# Altium PCB Transmitter.PcbDoc
Units mm, origin at the board's own origin, x right, y up, seen from the top; angles counter-clockwise.
Board outline 152.4 x 101.6 mm, 2 copper layers (Top Layer, Bottom Layer); 10 components, 10 nets, 31 pads, 0 vias.
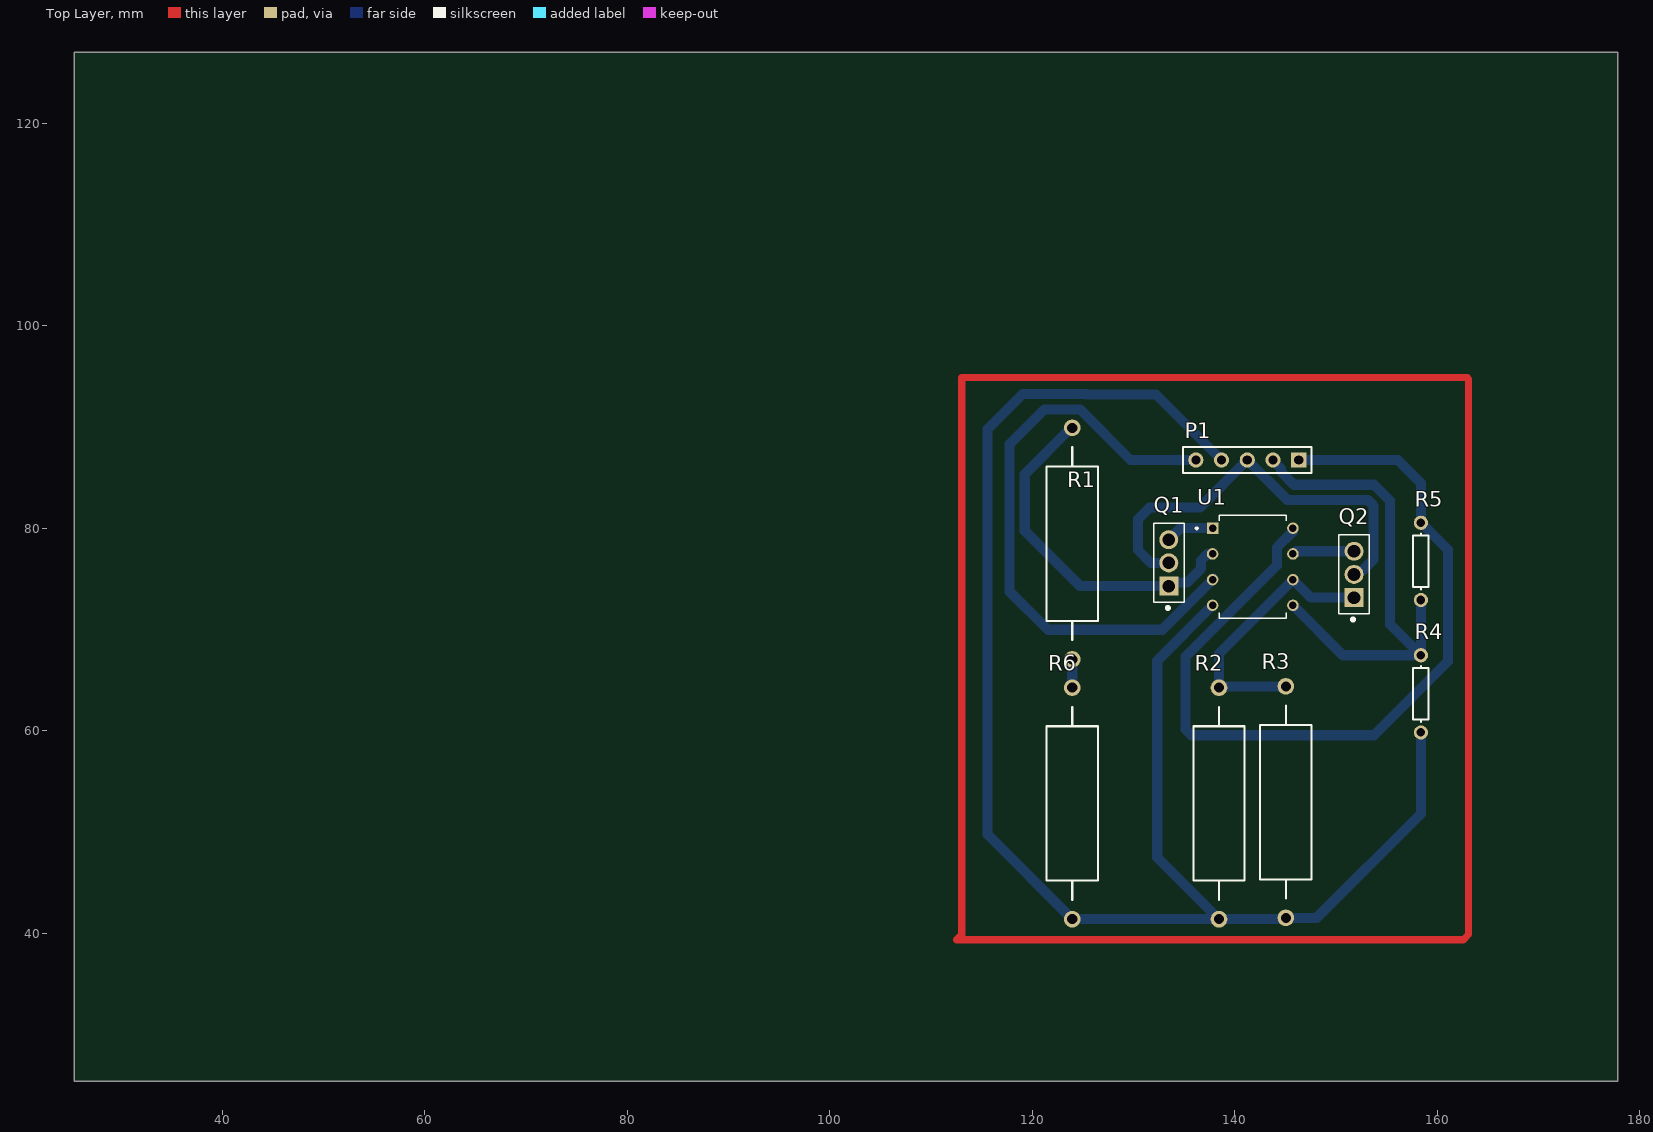
[diagram p0: Top Layer view]
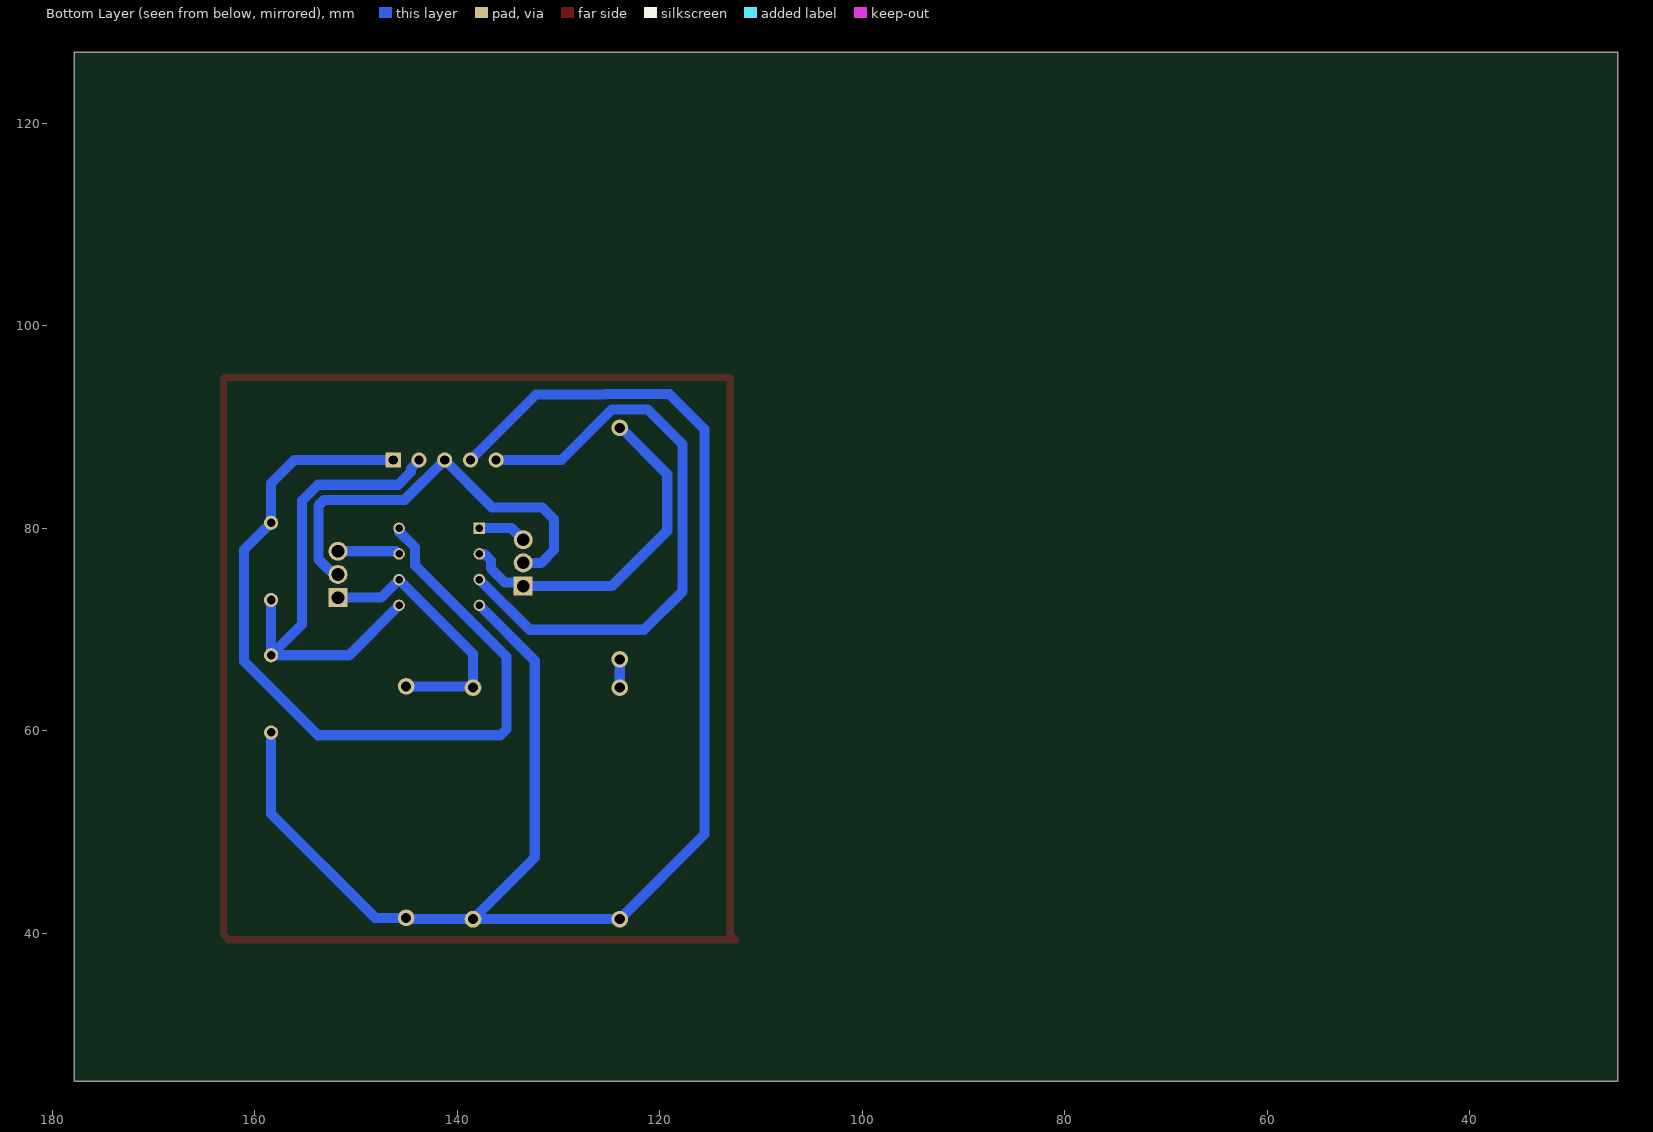
[diagram p1: Bottom Layer view, seen from below]

## Layer stack, top to bottom
Top Solder: solder mask 0.0102, Solder Resist, Dk 3.5
Top Layer: signal copper 0.0356
Dielectric 1: dielectric 0.32, FR-4, Dk 4.8
Bottom Layer: signal copper 0.0356
Bottom Solder: solder mask 0.0102, Solder Resist, Dk 3.5

## Board outline
25.4,25.4 177.8,25.4 177.8,127 25.4,127

## Design rules (kind name [scope] priority, off if disabled: settings)
Clearance [All] p1: gap=0.5 ignorepadtopadclearanceinfootprint=FALSE
PolygonConnect [All] p1: connectstyle=Relief reliefconductorwidth=0.254 reliefentries=4 polygonreliefangle="90 Angle" airgapwidth=0.254
RoutingLayers [All] p1: top layer_v5=FALSE bottom layer_v5=TRUE
RoutingVias [All] p1: holewidth=0.711 width=1.27 viastyle="Through Hole" minholewidth=0.711 minwidth=1.27 maxholewidth=0.711 maxwidth=1.27
SolderMaskExpansion [All] p1: expansion=0.102
Width [All] p1: maxlimit=1 minlimit=0.7 preferedwidth=0.8
29 further rules are at their usual default settings.

## Components (designator, comment, footprint, x,y, rotation, side; value= is the part's Value field where it differs from the comment)
P1 "Header 5" HDR1X5 146.304,86.741 r180 top
Q1 "BD135" *TO229P780X300X2000-3 133.477,74.291 r90 top
Q2 "BD135" *TO229P780X300X2000-3 151.765,73.152 r90 top
R1 "Res1" AXIAL-0.9 123.941,78.486 r90 top value=10
R2 "Res1" AXIAL-0.9 138.43,52.832 r90 top value=10
R3 "Res1" AXIAL-0.9 145.034,52.959 r90 top value=10
R4 "Res1" AXIAL-0.3 158.369,63.651 r90 top value=10k
R5 "Res1" AXIAL-0.3 158.369,76.732 r90 top value=20k
R6 "Res1" AXIAL-0.9 123.941,52.832 r90 top value=10
U1 "LM358N/NOPB" *DIP794W45P254L1016H508Q8 141.765,76.2 r0 top

## Footprints (in the part's own frame and the unit in brackets; to place one, negate y for a bottom-side part, rotate by r counter-clockwise, add the part's x,y. Pads: shape width x height; smd on the part's side, far side on the other; paste and mask are expansions set on the pad)
*DIP794W45P254L1016H508Q8 [mm]
  rect 1.14x1.14 hole 0.74: 1(-3.97,3.81)
  round 1.14 hole 0.74: 2(-3.97,1.27) 3(-3.97,-1.27) 4(-3.97,-3.81) 5(3.97,-3.81) 6(3.97,-1.27) 7(3.97,1.27) 8(3.97,3.81)
  silkscreen extent -5.63,-5.08 3.3,5.08
*TO229P780X300X2000-3 [mm]
  rect 1.875x1.875 hole 1.25: 1(0,0)
  round 1.875 hole 1.25: 2(2.29,0) 3(4.58,0)
  silkscreen extent -2.31,-1.5 6.19,1.5
AXIAL-0.3 [mm] "Axial Device, Thru-Hole; 2 Leads; 0.3 in Pin Spacing"
  round 1.4 hole 0.85: 1(-3.81,0) 2(3.81,0)
  silkscreen extent -2.77,-0.76 2.77,0.76
AXIAL-0.9 [mm] "Axial Device, Thru-Hole; 2 Leads; 0.9 in Pin Spacing"
  round 1.65 hole 1: 1(-11.43,0) 2(11.43,0)
  silkscreen extent -9.53,-2.54 9.53,2.54
HDR1X5 [mm] "Connector; Header; 5 Position"
  rect 1.5x1.5 hole 0.9: 1(0,0)
  round 1.5 hole 0.9: 2(2.54,0) 3(5.08,0) 4(7.62,0) 5(10.16,0)
  silkscreen extent -1.27,-1.27 11.43,1.27

## Part data
P1: "Header, 5-Pin", LatestRevisionDate=17-Jul-2002, LatestRevisionNote="Re-released for DXP Platform.", Publisher="Altium Limited"
Q1 Q2: "Trans GP BJT NPN 45V 1.5A 3-Pin TO-126", Package="TO-126-3 NXP Semiconductors", Availability=Unavailable, MF="ON Semiconductor", MP=BD135, Price=None, SnapEDA_Link=https://www.snapeda.com/parts/BD135/ON%20Semiconductor/view-part/?ref=snap
R1 R2 R3 R4 R5 R6: "Resistor", LatestRevisionDate=17-Jul-2002, LatestRevisionNote="Re-released for DXP Platform.", PackageDescription="Axial Device, Thru-Hole; 2 Leads; 0.3 in Pin Spacing", PackageReference=AXIAL-0.3, Published=8-Jun-2000, Publisher="Altium Limited"
U1: Package="DIP-8 Intersil", Availability=Unavailable, MF="ON Semiconductor", MP=LM358N, Price=None, SnapEDA_Link=https://www.snapeda.com/parts/LM358N/ON%20Semiconductor/view-part/?ref=snap

## Nets (pads, with @x,y where several pads share a name; then routed paths per layer and width w, separated by ;. In a path a pad name is that pad's centre, name@x,y a point inside that pad or via, vN(x,y) a via of type N, cw(c..) or ccw(c..) an arc to the next point about the centre after c; other vN are vias at no path point)
GND: P1.4 R2.1 R3.1 R4.1 R6.1 U1.4 | length 161.6
  Bottom Layer w1: U1.4 132.334,66.929 132.334,47.498 R2.1 ; P1.4 132.207,93.218 125.341,93.218 125.318,93.241 119.022,93.241 115.57,89.789 115.57,49.773 R6.1 R2.1 ; R4.1 158.369,51.816 148.082,41.529 R3.1 144.858,41.529 144.731,41.402 R2.1
INPUT: P1.5 U1.3 | length 60.2
  Bottom Layer w1: P1.5 129.697,86.741 124.697,91.741 121.205,91.741 117.729,88.265 117.729,73.787 121.539,69.977 132.842,69.977 U1.3 137.795,74.968 U1.3@137.865,75.038
LEDout: P1.3 Q1.2 Q2.2 | length 42.3
  Bottom Layer w0.8: Q2.2@151.474,75.442 Q2.2
  Bottom Layer w1: Q1.2 131.699,76.581 130.429,77.851 130.429,80.899 131.572,82.042 136.525,82.042 P1.3 145.161,82.804 153.117,82.804 153.703,82.218 153.703,76.929 152.568,75.794 152.354,75.794 152.002,75.442 Q2.2
NetQ1_1: Q1.1 R1.2 U1.2 | length 34.8
  Bottom Layer w1: R1.2 123.825,89.916 119.253,85.344 119.253,79.756 124.718,74.291 Q1.1 133.829,74.643 135.288,74.643 136.656,76.011 136.656,76.814 137.285,77.443 137.768,77.443 U1.2
NetQ1_3: Q1.3 U1.1 | length 4.8
  Bottom Layer w1: Q1.3 134.616,80.01 U1.1
NetQ2_1: Q2.1 R2.2 R3.2 U1.6 | length 27.3
  Bottom Layer w1: R3.2@144.91,64.513 R3.2 138.733,64.389 138.606,64.262 R2.2 138.43,67.625 U1.6 147.513,73.152 Q2.1
NetQ2_3: Q2.3 U1.7 | length 6.2
  Bottom Layer w0.8: U1.7 U1.7@145.8,77.405
  Bottom Layer w1: U1.7 145.773,77.47 146.035,77.732 Q2.3
NetR1_1: R1.1 R6.2 | length 2.8
  Bottom Layer w1: R6.2 R1.1
REF: P1.2 R4.2 R5.1 U1.5 | length 50.2
  Bottom Layer w1: P1.2@143.764,86.876 P1.2 143.764,86.695 144.554,85.905 144.554,85.577 145.827,84.304 153.738,84.304 155.321,82.721 155.321,70.509 R4.2 ; U1.5 150.664,67.461 R4.2 ; R5.1 R4.2
VCC: P1.1 R5.2 U1.8 | length 85.5
  Bottom Layer w1: U1.8 145.708,79.983 145.708,79.664 144.165,78.12 144.165,76.347 135.128,67.31 135.128,60.149 135.714,59.563 153.735,59.563 161.036,66.864 161.036,77.875 R5.2 158.369,84.455 156.083,86.741 P1.1 P1.1@146.554,86.991
copper on no net: | length 211.4
  Top Layer w0.7: 112.522,39.37 113.03,39.878 113.03,94.869 149.225,94.869 162.941,94.869 163.068,94.742 163.068,39.878 162.56,39.37 112.522,39.37